# Altium PCB Nyiri_Levente.PcbDoc
Units mm, origin at the board's own origin, x right, y up, seen from the top; angles counter-clockwise.
Board outline 90.17 x 68.76 mm, 2 copper layers (Top Layer, Bottom Layer); 40 components, 73 nets, 301 pads, 174 vias.
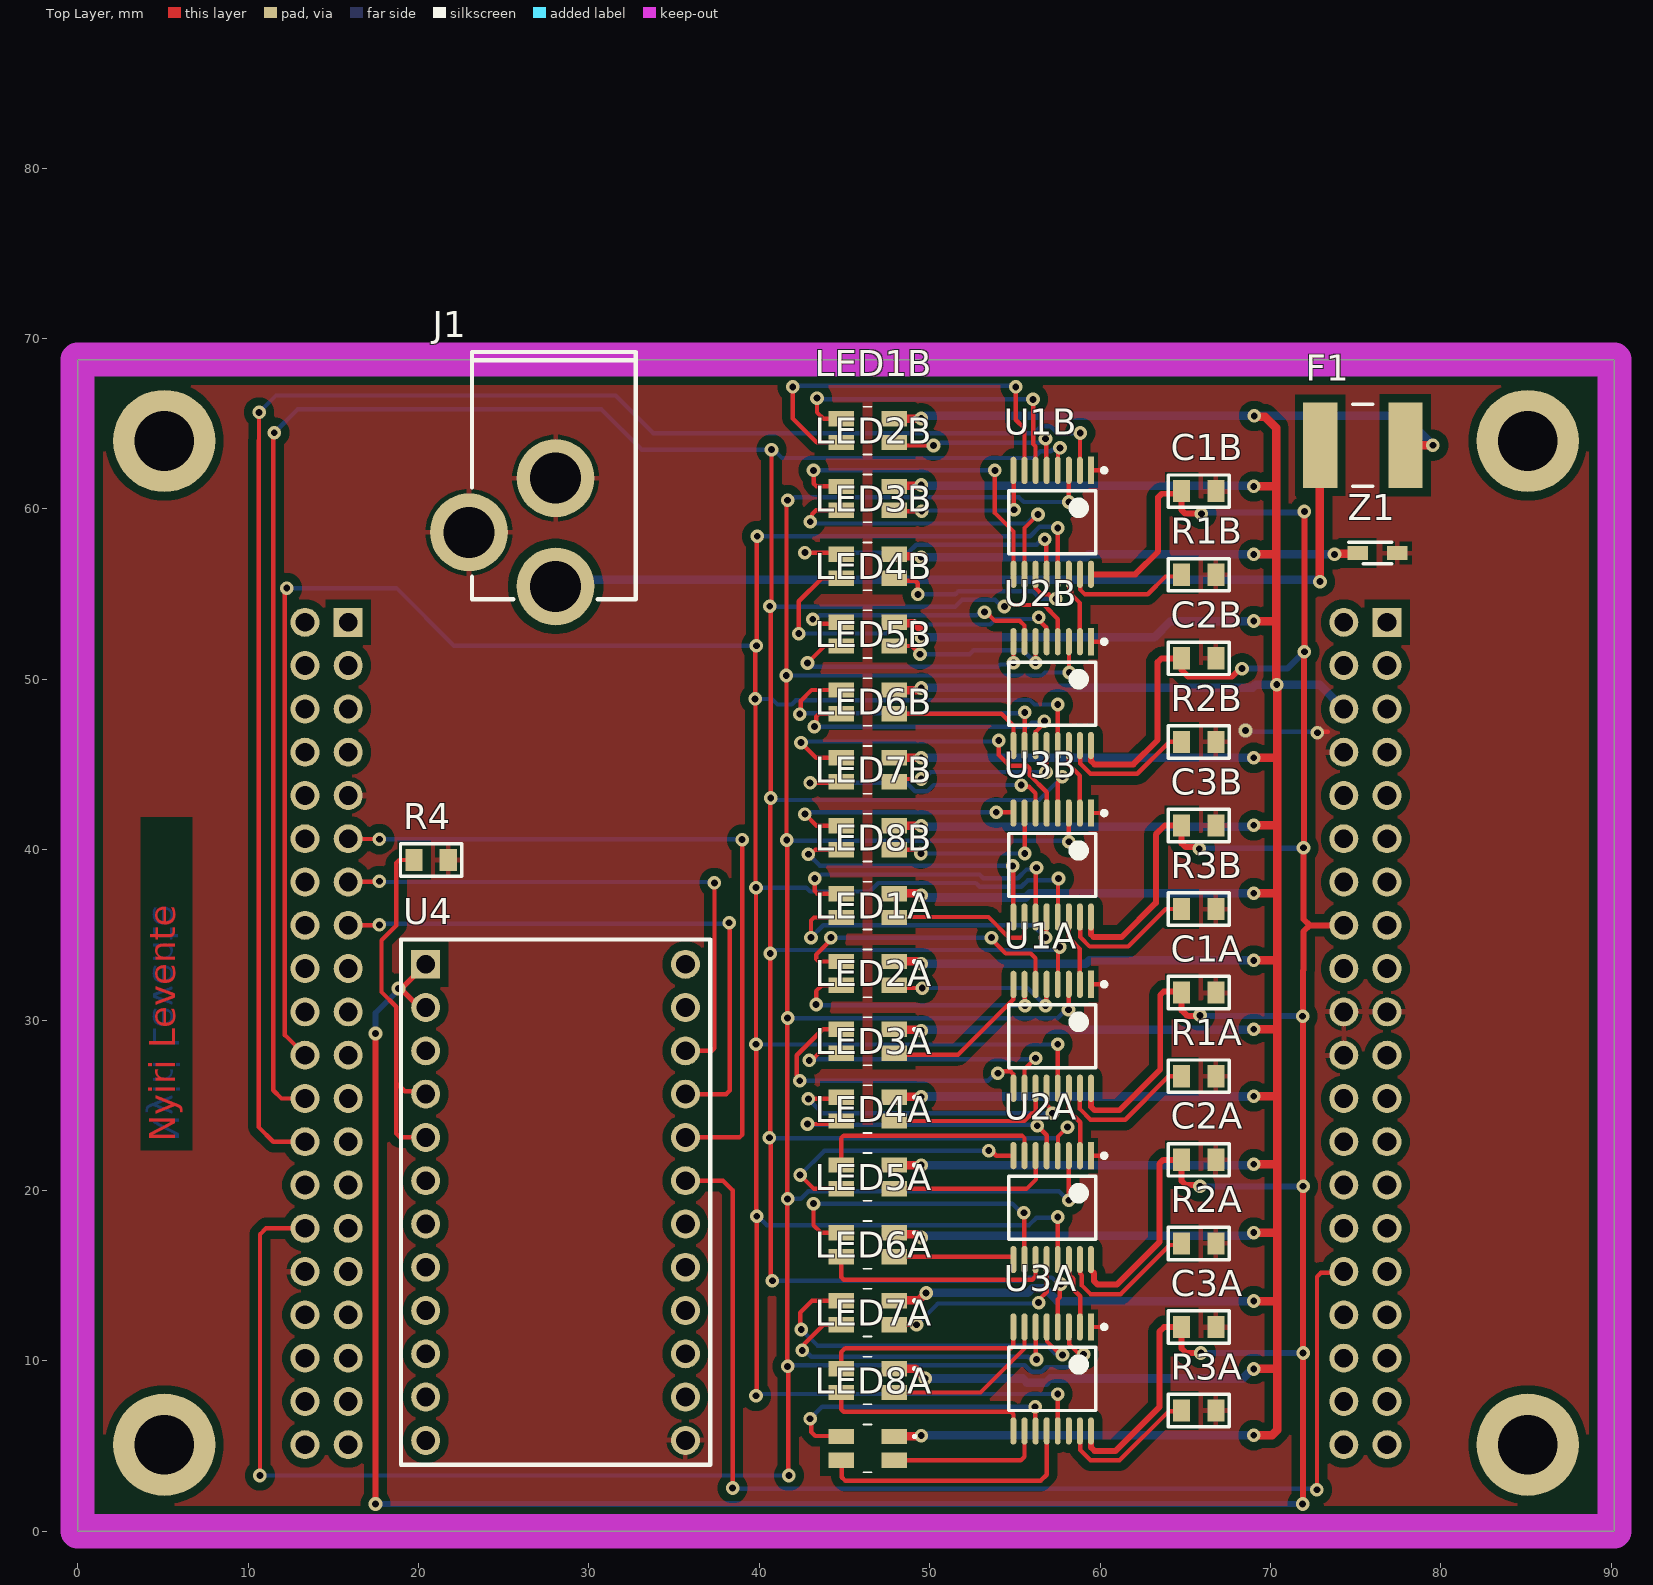
[diagram p0: Top Layer view]
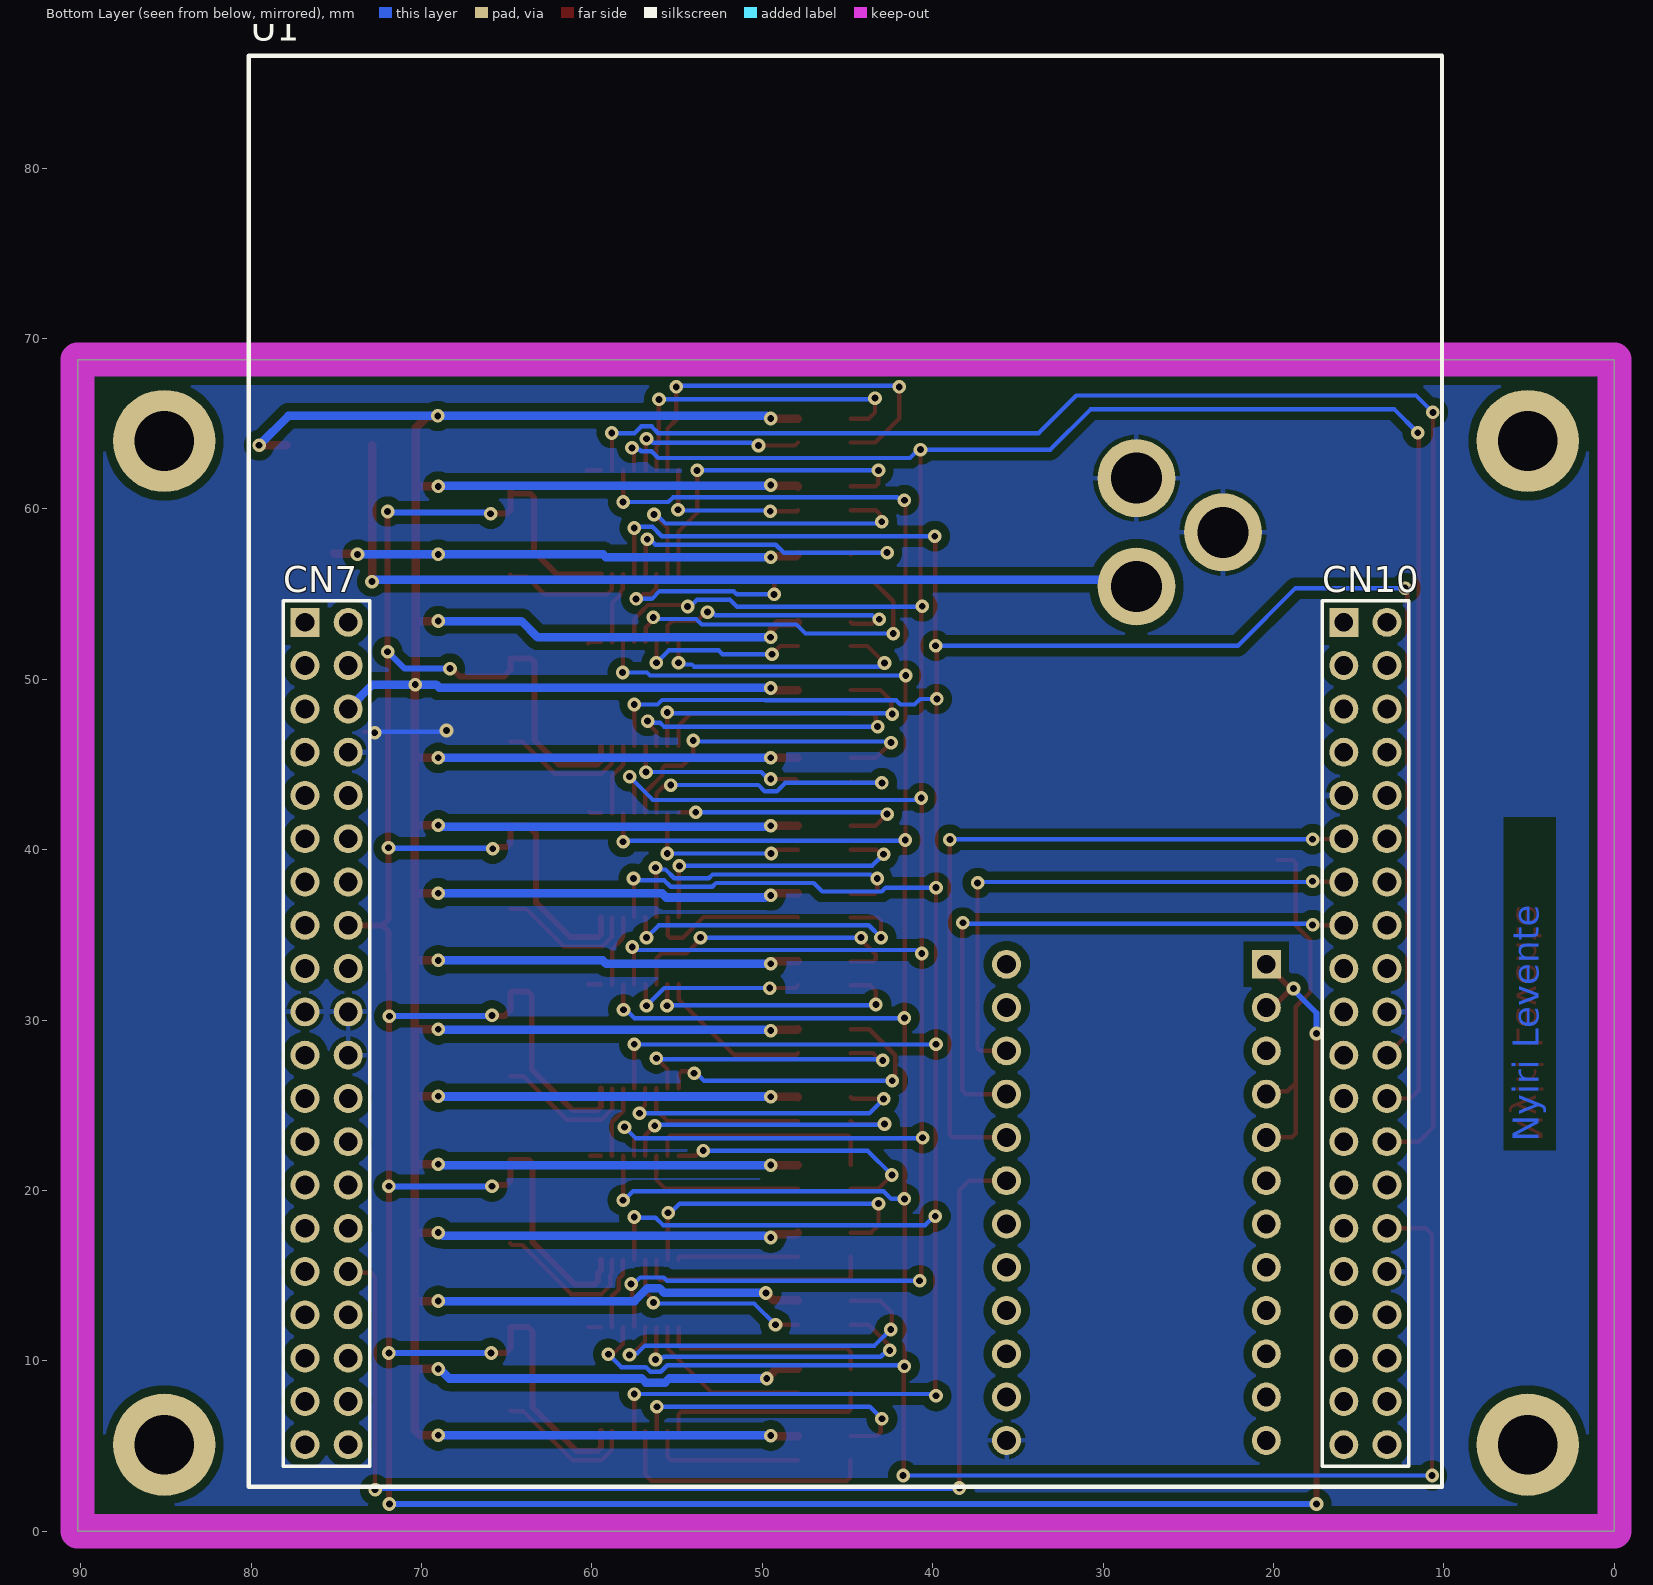
[diagram p1: Bottom Layer view, seen from below]
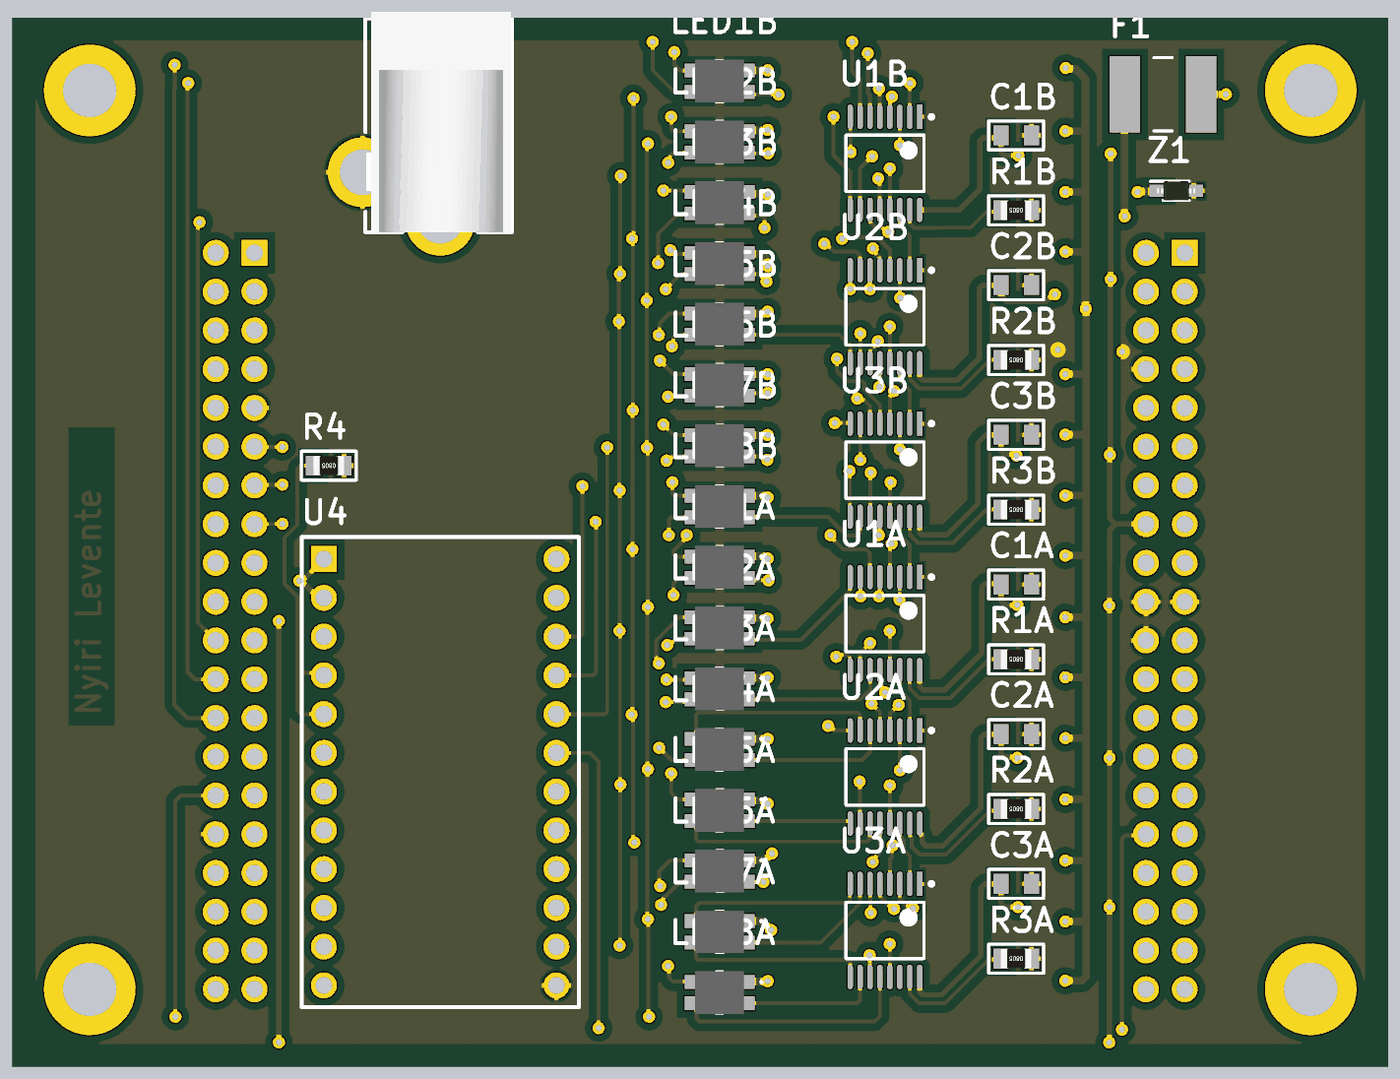
[diagram p2: 3D render of the assembled board from above, using the file's embedded part models]

## Layer stack, top to bottom
Top Solder: solder mask 0.0102, Solder Resist, Dk 3.5
Top Layer: signal copper 0.0356
Dielectric 1: dielectric 0.32, FR-4, Dk 4.8
Bottom Layer: signal copper 0.0356
Bottom Solder: solder mask 0.0102, Solder Resist, Dk 3.5

## Board outline
0,0 0,68.758 90.17,68.758 90.17,0

## Design rules (kind name [scope] priority, off if disabled: settings)
BoardOutlineClearance [All] p1: gap=0.5 ignorepadtopadclearanceinfootprint=FALSE
Clearance [All] p1: gap=0.25 ignorepadtopadclearanceinfootprint=FALSE except(0: Arc-Hole Track-Hole SMDPad-Hole THPad-Hole Via-Hole Fill-Hole Poly-Hole Region-Hole Text-Hole; 0.2: Track-THPad Track-Via THPad-THPad THPad-Via Via-Via; 0.5: Arc-Poly Track-Poly SMDPad-Poly THPad-Poly Via-Poly Fill-Poly Poly-Poly)
ComponentClearance [All] p1: gap=0.254 collisioncheckmode=3 verticalgap=0.2 showdistances=FALSE donotcheckwithout3dbody=TRUE
DiffPairsRouting [All] p1: maxlimit=0.25 minlimit=0.25 mostfreqgap=0.25 toplayer_minwidth=0.3 toplayer_maxwidth=0.38 toplayer_prefwidth=0.38 bottomlayer_minwidth=0.3 bottomlayer_maxwidth=0.38 bottomlayer_prefwidth=0.38 maxuncoupledlength=12.7
HoleSize [All] p1: absolutevalues=TRUE maxlimit=5 minlimit=0.4 maxpercent=80.000 minpercent=20.000
HoleToHoleClearance [All] p1: gap=0.25 allowstackedmicrovias=TRUE
MinimumAnnularRing [All] p1: minimumring=0.2
MinimumSolderMaskSliver [All] p1: minsoldermaskwidth=0.05
PlaneClearance [All] p1: clearance=0.5
PlaneConnect [All] p1: pad.planeconnectstyle=Relief pad.reliefexpansion=0.5 pad.reliefentries=4 pad.reliefconductorwidth=0.3 pad.reliefairgap=0.25 via.planeconnectstyle=Direct via.reliefexpansion=0.508 via.reliefentries=4 via.reliefconductorwidth=0.254 via.reliefairgap=0.254
PolygonConnect [All] p1: thpad.connectstyle=Relief thpad.reliefconductorwidth=0.3 thpad.reliefentries=4 thpad.polygonreliefangle="90 Angle" thpad.airgapwidth=0.25 smdpad.connectstyle=Relief smdpad.reliefconductorwidth=0.3 smdpad.reliefentries=4 smdpad.polygonreliefangle="90 Angle" smdpad.airgapwidth=0.25 via.connectstyle=Direct via.reliefconductorwidth=0.254 via.reliefentries=4 via.polygonreliefangle="90 Angle" via.airgapwidth=0.254
RoutingVias [All] p1: holewidth=0.4 width=0.8 viastyle="Through Hole" minholewidth=0.4 minwidth=0.7 maxholewidth=0.7 maxwidth=1.2
SilkToSilkClearance [All] p1: silktosilkclearance=0.1
SilkToSolderMaskClearance [IsPad] p1: minsilkscreentomaskgap=0.1 clearancetoexposedcopper=TRUE
SolderMaskExpansion [All] p1: expansion=0.1 istentingtop=FALSE
Width Width_2 [InNet('NetF1_1')] p1: maxlimit=0.5 minlimit=0.254 preferedwidth=0.45 minimp=50.000000 maximp=50.000000 favimp=50.000000
Width [InNet('5V')] p2: maxlimit=0.5 minlimit=0.25 preferedwidth=0.45 minimp=50.000000 maximp=50.000000 favimp=50.000000
Width Width_1 [InNet('3V3')] p3: maxlimit=0.35 minlimit=0.35 preferedwidth=0.35 minimp=50.000000 maximp=50.000000 favimp=50.000000
Width Width_alap [All] p4: maxlimit=0.254 minlimit=0.254 preferedwidth=0.254
21 further rules are at their usual default settings.

## Classes and differential pairs
channel class LED: U_LED1 U_LED2

## Components (designator, comment, footprint, x,y, rotation, side; value= is the part's Value field where it differs from the comment)
C1A "100nF" FP_0805_CAP_085 65.786,31.609 r180 top (schematic designator C1)
C1B "100nF" FP_0805_CAP_085 65.786,61.036 r180 top (schematic designator C1)
C2A "100nF" FP_0805_CAP_085 65.786,21.8 r180 top (schematic designator C2)
C2B "100nF" FP_0805_CAP_085 65.786,51.227 r180 top (schematic designator C2)
C3A "100nF" FP_0805_CAP_085 65.786,11.991 r180 top (schematic designator C3)
C3B "100nF" FP_0805_CAP_085 65.786,41.418 r180 top (schematic designator C3)
F1 "FUSE" 1812L125/16DR2.0 75.413,63.729 r0 top
J1 "2.xmm" FP_DC_TAP_ANYA 28.042,55.448 r0 top
LED1A "150141M173100" 150141M173100 46.354,32.738 r0 top (schematic designator LED1)
LED1B "150141M173100" 150141M173100 46.354,64.592 r0 top (schematic designator LED1)
LED2A "150141M173100" 150141M173100 46.354,28.756 r0 top (schematic designator LED2)
LED2B "150141M173100" 150141M173100 46.354,60.61 r0 top (schematic designator LED2)
LED3A "150141M173100" 150141M173100 46.354,24.774 r0 top (schematic designator LED3)
LED3B "150141M173100" 150141M173100 46.354,56.629 r0 top (schematic designator LED3)
LED4A "150141M173100" 150141M173100 46.354,20.793 r0 top (schematic designator LED4)
LED4B "150141M173100" 150141M173100 46.354,52.647 r0 top (schematic designator LED4)
LED5A "150141M173100" 150141M173100 46.354,16.811 r0 top (schematic designator LED5)
LED5B "150141M173100" 150141M173100 46.354,48.665 r0 top (schematic designator LED5)
LED6A "150141M173100" 150141M173100 46.354,12.829 r0 top (schematic designator LED6)
LED6B "150141M173100" 150141M173100 46.354,44.683 r0 top (schematic designator LED6)
LED7A "150141M173100" 150141M173100 46.354,8.847 r0 top (schematic designator LED7)
LED7B "150141M173100" 150141M173100 46.354,40.702 r0 top (schematic designator LED7)
LED8A "150141M173100" 150141M173100 46.354,4.866 r0 top (schematic designator LED8)
LED8B "150141M173100" 150141M173100 46.354,36.72 r0 top (schematic designator LED8)
R1A "1K" FP_0805_RES 65.786,26.705 r180 top (schematic designator R1)
R1B "1K" FP_0805_RES 65.786,56.132 r180 top (schematic designator R1)
R2A "1K" FP_0805_RES 65.786,16.896 r180 top (schematic designator R2)
R2B "1K" FP_0805_RES 65.786,46.323 r180 top (schematic designator R2)
R3A "1K" FP_0805_RES 65.786,7.087 r180 top (schematic designator R3)
R3B "1K" FP_0805_RES 65.786,36.514 r180 top (schematic designator R3)
R4 "1K" FP_0805_RES 20.745,39.395 r180 top
U1 "NUCLEO-F446RE" FP_NUCLEO-64_2x20 76.835,53.34 r180 bottom locked
U1A "STP08CP05TTR" TSOP65P640X120-16M 57.185,29.046 r270 top (schematic designator U1)
U1B "STP08CP05TTR" TSOP65P640X120-16M 57.185,59.207 r270 top (schematic designator U1)
U2A "STP08CP05TTR" TSOP65P640X120-16M 57.185,18.993 r270 top (schematic designator U2)
U2B "STP08CP05TTR" TSOP65P640X120-16M 57.185,49.154 r270 top (schematic designator U2)
U3A "STP08CP05TTR" TSOP65P640X120-16M 57.185,8.939 r270 top (schematic designator U3)
U3B "STP08CP05TTR" TSOP65P640X120-16M 57.185,39.1 r270 top (schematic designator U3)
U4 "MKI178V2" FP_DIL24 20.422,33.274 r180 top
Z1 "Zener_6V" SOD2512X115N 76.276,57.404 r0 top

## Footprints (in the part's own frame and the unit in brackets; to place one, negate y for a bottom-side part, rotate by r counter-clockwise, add the part's x,y. Pads: shape width x height; smd on the part's side, far side on the other; paste and mask are expansions set on the pad)
1812L125/16DR2.0 [mm] "Chip Resistor, 2-Leads, Body 4.55x3.24mm, IPC Low Density"
  rect 2x5 smd: 1(-2.5,0) 2(2.5,0)
  silkscreen extent -0.6,-2.4 0.6,2.4, body extent -2.36,-1.71 2.36,1.71, height 1.25
150141M173100 [mm]
  rect 1.5x0.9 smd: 1(1.55,0.7) 2(1.55,-0.7) 3(-1.55,0.7) 4(-1.55,-0.7)
  silkscreen extent -0.25,-1.4 2.8,1.4, body extent -1.6,-1.4 1.6,1.4, height 2.2
FP_0805_CAP_085 [mm] "0805 kapacitás YAGEO 0.85mm magas"
  rect 1x1.3 smd: 1(-1,0) 2(1,0)
  silkscreen extent -1.8,-0.95 1.8,0.95, body extent -1,-0.64 1.03,0.64, height 0.85
FP_0805_RES [mm] "0805 ellenállás"
  rect 1x1.3 smd: 1(-1,0) 2(1,0)
  silkscreen extent -1.8,-0.95 1.8,0.95, body extent -1,-0.62 1,0.63, height 0.62
FP_DC_TAP_ANYA [mil] "DC HEBA25 TÁPFESZÜLTSÉG ALJZAT ZÁRT, NYÁKBA 90°"
  round 180 hole 118: 1(0,0) 2(0,250) 3(-200,125)
  silkscreen extent -193,-30 185,541, body extent -190,-31 183,539, height 440
FP_DIL24 [mm] "DIL24"
  rect 1.7x1.7 hole 1.1: 1(0,0)
  round 1.7 hole 1.1: 2(0,2.54) 3(0,5.08) 4(0,7.62) 5(0,10.16) 6(0,12.7) 7(0,15.24) 8(0,17.78) 9(0,20.32) 10(0,22.86) 11(0,25.4) 12(0,27.94) 13(-15.24,27.94) 14(-15.24,25.4) 15(-15.24,22.86) 16(-15.24,20.32) 17(-15.24,17.78) 18(-15.24,15.24) 19(-15.24,12.7) 20(-15.24,10.16) 21(-15.24,7.62) 22(-15.24,5.08) 23(-15.24,2.54) 24(-15.24,0)
  silkscreen extent -16.7,-1.45 1.45,29.37, body extent -16.52,-1.28 1.28,29.21, height 4.86
FP_NUCLEO-64_2x20 [mm]
  round 1.7 hole 1.1: 0(0,-48.26) 0(2.54,-48.26) 0(60.96,-48.26) 0(63.5,-48.26) 2(2.54,0) 3(0,-2.54) 4(2.54,-2.54) 5(0,-5.08) 6(2.54,-5.08) 7(0,-7.62) 8(2.54,-7.62) 9(0,-10.16) 10(2.54,-10.16) 11(0,-12.7) 12(2.54,-12.7) 13(0,-15.24) 14(2.54,-15.24) 15(0,-17.78) 16(2.54,-17.78) 17(0,-20.32) 18(2.54,-20.32) 19(0,-22.86) 20(2.54,-22.86) 21(0,-25.4) 22(2.54,-25.4) 23(0,-27.94) 24(2.54,-27.94) 25(0,-30.48) 26(2.54,-30.48) 27(0,-33.02) 28(2.54,-33.02) 29(0,-35.56) 30(2.54,-35.56) 31(0,-38.1) 32(2.54,-38.1) 33(0,-40.64) 34(2.54,-40.64) 35(0,-43.18) 36(2.54,-43.18) 37(0,-45.72) 38(2.54,-45.72) 40(63.5,0) 41(60.96,-2.54) 42(63.5,-2.54) 43(60.96,-5.08) 44(63.5,-5.08) 45(60.96,-7.62) 46(63.5,-7.62) 47(60.96,-10.16) 48(63.5,-10.16) 49(60.96,-12.7) 50(63.5,-12.7) 51(60.96,-15.24) 52(63.5,-15.24) 53(60.96,-17.78) 54(63.5,-17.78) 55(60.96,-20.32) 56(63.5,-20.32) 57(60.96,-22.86) 58(63.5,-22.86) 59(60.96,-25.4) 60(63.5,-25.4) 61(60.96,-27.94) 62(63.5,-27.94) 63(60.96,-30.48) 64(63.5,-30.48) 65(60.96,-33.02) 66(63.5,-33.02) 67(60.96,-35.56) 68(63.5,-35.56) 69(60.96,-38.1) 70(63.5,-38.1) 71(60.96,-40.64) 72(63.5,-40.64) 73(60.96,-43.18) 74(63.5,-43.18) 75(60.96,-45.72) 76(63.5,-45.72)
  rect 1.7x1.7 hole 1.1: 1(0,0) 39(60.96,0)
  silkscreen extent -3.3,-50.73 66.72,33.25, body extent -3.3,-50.72 66.72,33.25, height 11
SOD2512X115N [mm]
  rect 1.2x0.8 smd: 1(-1.15,0) 2(1.15,0)
  silkscreen extent -1.7,-0.62 0.85,0.63, body extent -1.25,-0.63 1.25,0.63, height 1.04
TSOP65P640X120-16M [mm] "TSOP, 16-Leads, Body 5,00x4,40mm, Pitch 0,65mm, IPC Low Density"
  rect 1.6x0.35 smd: 1(-3.05,2.275)
  oval 1.6x0.35 smd: 2(-3.05,1.625) 3(-3.05,0.975) 4(-3.05,0.325) 5(-3.05,-0.325) 6(-3.05,-0.975) 7(-3.05,-1.625) 8(-3.05,-2.275) 9(3.05,-2.275) 10(3.05,-1.625) 11(3.05,-0.975) 12(3.05,-0.325) 13(3.05,0.325) 14(3.05,0.975) 15(3.05,1.625) 16(3.05,2.275)
  silkscreen extent -3.17,-2.55 1.85,3.17, body extent -2.25,-2.55 2.25,2.55, height 1.2

## Part data
C1A C1B C2A C2B C3A C3B: library part CAP, "Capacitor", Name=0805B104K500NT, Reference=82-13-46, Supplier=Lomex
F1: library part 1812L125/16DR, "PTC Resettable Fuse, 16V, Surface Mount", ComponentLink1Description=https://datasheet.ciiva.com:443/pdfs/VipMasterIC/IC/LFSI/LFSI-S-A0007892087/LFSI-S-A0007892087-1.pdf?src-supplier=IHS+Markit, ComponentLink1URL=https://datasheet.ciiva.com:443/pdfs/VipMasterIC/IC/LFSI/LFSI-S-A0007892087/LFSI-S-A0007892087-1.pdf?src-supplier=IHS+Markit, ComponentLink2Description=https://datasheet.ciiva.com/12541/littelfuse-ptc-1812l-12541791.pdf?src-supplier=Mouser, ComponentLink2URL=https://datasheet.ciiva.com/12541/littelfuse-ptc-1812l-12541791.pdf?src-supplier=Mouser, ComponentLink3Description=https://datasheet.ciiva.com/1273/48544-1273746.pdf?src-supplier=Element14, ComponentLink3URL=https://datasheet.ciiva.com/1273/48544-1273746.pdf?src-supplier=Element14, ComponentLink4Description=https://datasheet.ciiva.com/326/littelfuse-ptc-1812l-326975.pdf?src-supplier=Digikey, ComponentLink4URL=https://datasheet.ciiva.com/326/littelfuse-ptc-1812l-326975.pdf?src-supplier=Digikey, ComponentLink5Description=https://datasheet.ciiva.com/326/littelfuse-ptc-1812l-326976.pdf?src-supplier=Digikey, ComponentLink5URL=https://datasheet.ciiva.com/326/littelfuse-ptc-1812l-326976.pdf?src-supplier=Digikey, ComponentLink6Description=https://datasheet.ciiva.com/326/littelfuse-ptc-1812l-326977.pdf?src-supplier=Digikey, ComponentLink6URL=https://datasheet.ciiva.com/326/littelfuse-ptc-1812l-326977.pdf?src-supplier=Digikey, Name=1812L125/16DR, Reference=44-04-71, Supplier=Lomex
J1: library part DC_TAP_ANYA, "2.xmm DC HEBA25 TÁPFESZÜLTSÉG ALJZAT ZÁRT, NYÁKBA 90°", Name="TÁP DC ANYA 5.5/2.1/9.5mm DCS-5521-5", Reference=43-07-67, Supplier=Lomex
LED1A LED1B LED2A LED2B LED3A LED3B LED4A LED4B LED5A LED5B LED6A LED6B LED7A LED7B LED8A LED8B: "LED", Name=FYLS-3528RGBC-CA, Reference=95-03-52, Supplier=Lomex
R1A R1B R2A R2B R3A R3B R4: library part RES, "Resistor", Name=CR-05JL7, Reference=81-10-87, Supplier=Lomex
U1A U1B U2A U2B U3A U3B: "Low voltage, low current power 8-bit shift register", Name=STP08CP05TTR, Reference=Tanszék, Supplier=ST
U4: library part MKI160V1, "LSM6DS3 inertial module adapter", Name=MKI178V2, Reference=Tanszék, Supplier=ST
Z1: library part BZT52C6V2S, "Zener Diode", Name=BZT52C6V2S, Reference=85-02-89, Supplier=Lomex
U1: Name="Nucleo F446RE", Reference=NUCLEO, Supplier=Tanszék

## Free pads (board coordinates)
  round 6 hole 3.5: ""(5.08,5.08) ""(5.08,63.983) ""(85.09,5.08) ""(85.09,63.983)

## Via types
v1: diameter 0.8, hole 0.4, Top Layer to Bottom Layer, 174 vias

## Nets (pads, with @x,y where several pads share a name; then routed paths per layer and width w, separated by ;. In a path a pad name is that pad's centre, name@x,y a point inside that pad or via, vN(x,y) a via of type N, cw(c..) or ccw(c..) an arc to the next point about the centre after c; other vN are vias at no path point)
3V3: C1A.2 C1B.2 C2A.2 C2B.2 C3A.2 C3B.2 U1.16 U1A.16 U1B.16 U2A.16 U2B.16 U3A.16 U3B.16 U4.1 U4.2 | length 269
  Top Layer w0.35: v1(17.475,1.6) v1(17.475,29.21) ; v1(18.821,31.852) 18.908,31.938 19.085,31.938 U4.1 ; v1@18.943,31.852 20.061,30.734 U4.2 ; U3A.16 59.46,4.923 59.665,4.718 60.909,4.718 63.475,7.283 63.475,11.709 63.756,11.991 C3A.2 64.786,10.728 65.049,10.465 v1(65.913,10.465) ; U2A.16@59.46,15.932 59.46,15.318 59.646,15.131 59.646,14.676 59.851,14.471 60.979,14.471 63.475,16.967 63.475,21.565 63.71,21.8 C2A.2 64.786,20.558 65.024,20.32 65.786,20.32 v1(65.862,20.244) ; U1A.16@59.46,25.976 59.46,24.912 59.665,24.707 61.131,24.707 63.525,27.102 63.525,31.469 63.73,31.674 C1A.2@64.721,31.674 ; U3B.16@59.46,36.02 59.46,35.019 59.609,34.87 61.261,34.87 63.271,36.881 63.271,40.894 63.796,41.418 C3B.2 64.786,40.37 65.014,40.142 65.725,40.142 v1(65.811,40.056) ; U2B.16@59.46,46.063 59.46,45.207 59.665,45.002 61.944,45.002 63.373,46.431 63.373,51.003 63.597,51.227 C2B.2 64.77,51.211 64.77,50.548 65.166,50.152 67.734,50.152 68.204,50.622 v1(68.326,50.622) ; U1B.16 62.063,56.157 63.398,57.493 63.398,60.679 63.603,60.884 64.634,60.884 C1B.2 64.786,59.92 64.991,59.715 v1(65.938,59.715) ; C1A.2 64.786,30.566 65.1,30.251 65.839,30.251 v1(65.862,30.275) ; v1(71.882,1.6) 71.895,1.613 71.895,10.452 v1(71.907,10.465) v1(71.907,20.244) 71.907,32.918 71.933,32.944 71.933,35.204 72.288,35.56 ; v1(71.984,59.842) v1(71.984,51.613) 71.958,51.587 71.958,40.132 v1(71.933,40.107) 71.933,35.916 72.288,35.56 ; U1.16 72.288,35.56
  Bottom Layer w0.35: v1(17.475,1.6) v1(71.882,1.6) ; v1(17.475,29.21) 17.475,30.415 18.821,31.761 v1(18.821,31.852) ; v1(65.811,40.056) 65.837,40.081 71.907,40.081 v1(71.933,40.107) ; v1(65.862,20.244) v1(71.907,20.244) ; v1(65.862,30.275) 65.887,30.251 71.857,30.251 v1(71.882,30.226) ; v1(65.913,10.465) v1(71.907,10.465) ; v1(65.938,59.715) 66.002,59.779 71.92,59.779 v1(71.984,59.842) ; v1(68.326,50.622) 68.339,50.635 71.006,50.635 v1(71.984,51.613)
5V: F1.2 LED1A.1 LED1B.1 LED2A.1 LED2B.1 LED3A.1 LED3B.1 LED4A.1 LED4B.1 LED5A.1 LED5B.1 LED6A.1 LED6B.1 LED7A.1 LED7B.1 LED8A.1 LED8B.1 U1.6 Z1.1 | length 444.2
  Top Layer w0.5: LED8A.1 47.928,5.589 v1@49.354,5.589 ; LED7A.1 47.906,9.549 49.15,9.549 v1(49.733,8.966) ; LED6A.1 47.922,13.546 49.335,13.546 49.768,13.98 v1(49.784,13.98) ; LED5A.1 47.976,17.439 v1@49.224,17.439 ; LED4A.1 47.907,21.491 v1@49.375,21.491 ; LED3A.1 47.918,25.488 v1@49.44,25.488 ; LED2A.1 47.942,29.419 49.467,29.419 v1(49.505,29.382) ; LED1A.1 47.924,33.458 49.275,33.458 49.423,33.309 v1(49.505,33.309) ; LED8B.1 47.914,37.43 49.308,37.43 49.423,37.314 v1(49.505,37.314) ; LED7B.1 v1@49.403,41.402 ; LED6B.1 47.908,45.387 v1@49.324,45.387 ; LED5B.1 47.911,49.359 49.293,49.359 49.423,49.489 v1(49.505,49.489) ; LED4B.1 47.966,53.285 49.103,53.285 49.449,52.94 ; LED3B.1 48.012,57.221 49.447,57.221 v1(49.505,57.164) ; LED2B.1 47.949,61.355 49.46,61.355 v1(49.505,61.399) ; LED1B.1 47.91,65.298 49.499,65.298 v1(49.505,65.303) ; v1(69.012,5.639) 70.091,5.639 70.383,5.932 70.383,9.525 ; v1(69.012,9.525) 70.383,9.525 ; v1(69.012,13.513) 70.383,13.513 ; v1(69.012,17.526) 70.383,17.526 ; v1(69.012,21.539) 70.383,21.539 ; v1(69.012,25.527) 70.383,25.527 ; v1(69.012,29.464) 70.383,29.464 ; v1(69.012,33.503) 70.383,33.503 ; v1(69.012,37.44) 70.383,37.44 ; v1(69.012,41.427) 70.383,41.427 ; v1(69.012,45.39) 70.383,45.39 ; v1(69.012,53.416) 70.32,53.416 ; v1(69.012,57.328) 70.32,57.328 ; v1(69.012,61.316) 70.32,61.316 ; v1(69.037,65.456) 69.095,65.398 69.681,65.398 70.32,64.759 70.32,61.316 ; v1(73.748,57.328) 73.786,57.366 75.088,57.366 Z1.1 ; U1.6 U1.6@74.295,48.273 ; F1.2 v1(79.527,63.729) ; 70.32,53.416 70.32,49.72 70.383,49.657 70.383,45.39 ; 70.32,53.416 70.32,57.328 ; 70.32,57.328 70.32,61.316 ; 70.383,9.525 70.383,13.513 ; 70.383,13.513 70.383,17.526 ; 70.383,17.526 70.383,21.539 ; 70.383,21.539 70.383,25.527 ; 70.383,25.527 70.383,29.464 ; 70.383,29.464 70.383,33.503 ; 70.383,33.503 70.383,37.44 ; 70.383,37.44 70.383,41.427 ; 70.383,41.427 70.383,45.39
  Bottom Layer w0.5: v1@49.39,5.626 v1@69.126,5.626 ; v1@49.466,25.514 v1@69.05,25.514 ; v1(49.505,17.24) 49.562,17.298 49.774,17.298 49.817,17.34 v1@68.745,17.34 ; v1(49.505,21.488) 68.961,21.488 v1(69.012,21.539) ; v1(49.505,29.382) 49.548,29.425 68.973,29.425 v1(69.012,29.464) ; v1(49.505,33.309) 59.161,33.309 59.355,33.503 v1@69.088,33.503 ; v1(49.505,37.314) 49.562,37.257 49.774,37.257 49.84,37.191 55.634,37.191 55.882,37.44 v1(69.012,37.44) ; v1(49.505,41.402) 49.562,41.345 49.774,41.345 49.779,41.339 68.712,41.339 68.742,41.37 68.954,41.37 v1(69.012,41.427) ; v1(49.505,45.39) 56.456,45.39 56.468,45.402 57.172,45.402 57.184,45.39 v1(69.012,45.39) ; v1(49.505,49.489) 49.527,49.511 68.958,49.511 69.13,49.682 72.873,49.682 U1.6 ; v1(49.505,57.164) 59.176,57.164 59.34,57.328 v1(73.748,57.328) ; v1(49.505,61.399) 49.546,61.357 68.97,61.357 v1(69.012,61.316) ; v1(49.505,65.303) 49.586,65.303 49.746,65.464 69.029,65.464 v1(69.037,65.456) 77.8,65.456 v1(79.527,63.729) ; v1(49.506,52.466) 63.184,52.466 64.135,53.416 v1(69.012,53.416) ; v1(49.733,8.966) 55.464,8.966 55.7,8.73 56.822,8.73 57.058,8.966 68.372,8.966 v1@68.943,9.538 ; v1(49.784,13.98) 49.8,13.995 55.76,13.995 56.035,14.27 56.739,14.27 57.496,13.513 v1@69.063,13.513
  other v1: 49.505,5.613 49.505,25.502 70.358,49.682
D6_2A: LED6A.2 U2A.12 | length 11.7
  Top Layer w0.254: LED6A.2 47.918,12.116 v1(49.225,12.116) ; v1(56.387,13.42) 56.387,13.567 56.86,14.041 U2A.12
  Bottom Layer w0.254: v1(49.225,12.116) 50.478,13.368 56.335,13.368 v1(56.387,13.42)
D6_2B: LED6B.2 U2B.12 | length 10.7
  Top Layer w0.254: LED6B.2 48.069,44.147 v1(49.505,44.147) ; v1(56.82,44.552) 56.842,44.574 56.842,46.085 U2B.12
  Bottom Layer w0.254: v1(49.505,44.147) 49.652,44.147 50.057,44.552 v1(56.82,44.552)
GND: C1A.1 C1B.1 C2A.1 C2B.1 C3A.1 C3B.1 J1.2 J1.3 R1A.1 R1B.1 R2A.1 R2B.1 R3A.1 R3B.1 R4.1 U1.8 U1.19 U1.20 U1.22 U1.47 U1.58 U1.70 U1A.1 U1B.1 U2A.1 U2B.1 U3A.1 U3B.1 U4.13 Z1.2 | length 9.4
  Top Layer w0.254: U3A.1 60.223,11.989 ; U2A.1 60.092,22.043 60.096,22.047 ; U1A.1 59.47,32.106 60.223,32.106 ; U3B.1 60.082,42.15 60.147,42.215 ; U2B.1 60.141,52.204 60.223,52.121 ; U1B.1 60.272,62.257 60.3,62.23 ; v1(72.746,46.863) 72.796,46.914 73.355,46.914
  Bottom Layer w0.254: v1(68.529,46.99) 68.593,46.926 72.682,46.926 v1(72.746,46.863)
LED_CLKA: U1.68 U1A.3 U1B.3 U2A.3 U2B.3 U3A.3 U3B.3 | length 218.5
  Top Layer w0.254: v1(10.693,3.277) 10.693,17.424 11.049,17.78 U1.68 ; v1(41.656,60.503) 41.589,60.436 41.589,50.225 v1(41.58,50.216) 41.593,50.203 41.593,40.564 41.646,40.51 41.646,30.134 v1(41.656,30.124) 41.631,30.099 41.631,19.507 41.631,9.703 41.694,9.639 41.694,3.315 v1(41.732,3.277) ; v1(58.141,30.607) 58.15,30.617 58.15,32.086 U1A.3 ; U3A.3 58.179,11.97 58.179,10.986 58.671,10.493 58.925,10.493 v1(59.03,10.389) ; U2A.3 58.163,22.04 58.163,19.434 v1(58.166,19.431) ; U3B.3 58.163,42.147 58.163,40.465 v1(58.166,40.462) ; U2B.3 58.176,52.188 58.176,50.409 v1(58.191,50.394) ; U1B.3 58.163,62.254 58.163,60.404 v1(58.166,60.401)
  Bottom Layer w0.254: v1(10.693,3.277) v1(41.732,3.277) ; v1(41.58,50.216) 56.589,50.216 56.767,50.394 v1(58.191,50.394) ; v1(41.605,40.564) 41.656,40.513 58.115,40.513 v1(58.166,40.462) ; v1(41.656,9.677) 41.716,9.738 55.579,9.738 55.96,9.357 56.562,9.357 56.829,9.623 58.264,9.623 v1(59.03,10.389) ; v1(41.656,19.507) 41.662,19.513 42.437,19.513 42.879,19.955 57.585,19.955 58.109,19.431 v1(58.166,19.431) ; v1(41.656,30.124) 41.672,30.109 57.494,30.109 57.993,30.607 v1(58.141,30.607) ; v1(41.656,60.503) 41.76,60.607 42.013,60.607 42.078,60.672 55.241,60.672 55.512,60.401 v1(58.166,60.401)
LED_LEA: U1.62 U1A.4 U1B.4 U2A.4 U2B.4 U3A.4 U3B.4 | length 236.9
  Top Layer w0.254: v1(11.532,64.465) 11.481,64.414 11.481,25.883 11.963,25.4 U1.62 ; v1(40.716,63.475) 40.716,54.381 v1(40.615,54.28) 40.665,54.229 v1(40.665,43.028) 40.64,43.002 v1(40.64,33.909) 40.64,23.139 v1(40.589,23.089) 40.678,23 40.678,14.795 v1(40.767,14.707) ; v1(54.381,54.266) 54.474,54.359 56.701,54.359 57.127,53.933 57.127,53.912 57.51,53.529 57.51,52.24 57.492,52.222 U2B.4 ; U3A.4 57.51,13.606 57.637,13.733 57.637,14.454 v1(57.697,14.514) ; U2A.4 57.529,22.061 57.529,23.162 v1(58.084,23.718) ; U1A.4 57.529,32.115 57.529,34.191 v1(57.626,34.289) ; U3B.4 57.508,42.152 57.508,43.924 57.783,44.199 v1(57.783,44.284) ; U1B.4 57.529,62.276 57.529,63.317 57.641,63.429 v1(57.641,63.577)
  Bottom Layer w0.254: v1(11.532,64.465) 12.903,65.837 30.734,65.837 33.096,63.475 40.843,63.475 41.332,62.986 56.096,62.986 56.493,63.383 57.096,63.383 57.185,63.472 57.536,63.472 v1(57.641,63.577) ; v1(40.589,23.089) 40.605,23.073 57.439,23.073 v1(58.084,23.718) ; v1(40.615,54.28) 40.64,54.254 51.477,54.254 51.89,54.667 53.833,54.667 54.234,54.266 v1(54.381,54.266) ; v1(40.64,33.909) 40.788,33.909 40.991,34.112 57.302,34.112 57.478,34.289 v1(57.626,34.289) ; v1(40.665,43.028) 40.77,42.923 41.08,42.923 41.087,42.916 56.416,42.916 v1(57.783,44.284) ; v1(40.767,14.707) 55.585,14.707 55.775,14.897 57.166,14.897 57.549,14.514 v1(57.697,14.514)
LED_OEA: U1.60 U1A.13 U1B.13 U2A.13 U2B.13 U3A.13 U3B.13 | length 230
  Top Layer w0.254: v1(12.268,55.347) 12.268,55.199 12.158,55.089 12.158,29.117 U1.60 ; v1(39.802,7.95) 39.853,8.001 v1(39.853,18.491) 39.827,18.517 39.827,28.55 v1(39.802,28.575) 39.802,37.918 39.776,37.943 39.776,48.819 v1(39.751,48.844) 39.751,51.892 39.853,51.994 39.853,58.369 v1(39.878,58.395) ; U1B.13@57.495,56.142 U1B.13 57.508,56.16 57.508,58.875 v1(57.506,58.877) ; v1(57.506,8.052) 57.508,8.049 57.508,5.891 U3A.13 ; v1(57.506,18.44) 57.508,18.438 57.508,15.945 U2A.13 ; v1(57.506,28.575) 57.508,28.573 57.508,25.999 U1A.13 ; v1(57.506,48.514) 57.508,48.512 57.508,46.106 U2B.13 U2B.13@57.529,46.122 ; U3B.13 57.529,36.068 57.529,38.275 v1(57.556,38.303)
  Bottom Layer w0.254: v1(12.268,55.347) 18.705,55.347 22.083,51.968 v1(39.827,51.968) ; v1(39.751,48.844) 40.733,48.844 41.063,48.514 41.898,48.514 42.146,48.762 49.806,48.762 49.828,48.784 55.876,48.784 56.146,48.514 v1(57.506,48.514) ; v1(39.802,7.95) 39.903,8.052 v1(57.506,8.052) ; v1(39.802,28.575) 39.814,28.562 57.493,28.562 v1(57.506,28.575) ; v1(39.802,37.77) 42.761,37.77 42.99,37.541 46.475,37.541 46.976,38.041 52.708,38.041 52.931,37.818 55.374,37.818 55.757,38.202 57.455,38.202 v1(57.556,38.303) ; v1(39.853,18.491) 39.909,18.491 40.433,17.967 55.826,17.967 56.248,18.39 57.455,18.39 v1(57.506,18.44) ; v1(39.878,58.395) 55.893,58.395 56.442,58.944 57.439,58.944 v1(57.506,58.877)
LED_SDIA: U1A.2 U3B.14 | length 4.2
  Top Layer w0.254: U3B.14@58.16,36.02 58.16,34.892 58.24,34.812 58.24,34.742 58.81,34.172 U1A.2@58.81,32.076
LED_SDIB: U1.64 U1B.2 | length 97
  Top Layer w0.254: v1(10.643,65.659) 10.64,65.656 10.64,64.041 10.617,64.018 10.617,23.724 11.481,22.86 U1.64 ; U1B.2 58.818,62.265 58.818,64.445 v1(58.826,64.453)
  Bottom Layer w0.254: v1(10.643,65.659) 11.633,66.65 31.572,66.65 33.782,64.44 56.096,64.44 56.493,64.837 57.096,64.837 57.492,64.44 v1@58.813,64.44
NetF1_1: F1.1 J1.1 | length 53.1
  Top Layer w0.5: v1(72.898,55.728) 72.898,63.714 F1.1
  Bottom Layer w0.5: J1.1 28.425,55.831 72.713,55.831 72.817,55.728 v1(72.898,55.728)
NetLED1A_2: LED1A.2 U1A.5 | length 10.7
  Top Layer w0.254: LED1A.2 48.065,31.877 v1(49.555,31.877) ; v1(56.794,30.836) 56.842,30.883 56.842,32.078 U1A.5
  Bottom Layer w0.254: v1(49.555,31.877) 55.753,31.877 v1(56.794,30.836)
NetLED1A_3: LED1A.3 U1A.6 | length 17.2
  Top Layer w0.254: v1(44.196,34.839) 44.196,34.696 43.332,33.833 43.332,33.587 43.481,33.438 LED1A.3 ; v1(53.619,34.839) 53.619,34.747 54.458,33.909 55.931,33.909 56.21,33.63 U1A.6
  Bottom Layer w0.254: v1(44.196,34.839) v1(53.619,34.839)
NetLED1A_4: LED1A.4 U1A.7 | length 16
  Top Layer w0.254: v1(43.332,30.912) 43.332,31.699 43.671,32.038 LED1A.4 ; U1A.7 55.573,32.084 55.573,30.848 v1(55.586,30.836)
  Bottom Layer w0.254: v1(43.332,30.912) 43.37,30.874 55.548,30.874 v1(55.586,30.836)
NetLED1B_2: LED1B.2 U1B.5 | length 11
  Top Layer w0.254: LED1B.2 48.084,63.713 v1(50.216,63.713) ; v1(56.794,64.11) 56.842,64.062 56.842,62.276 U1B.5
  Bottom Layer w0.254: v1(50.216,63.713) 50.32,63.817 50.568,63.817 50.638,63.887 56.424,63.887 56.647,64.11 v1(56.794,64.11)
NetLED1B_3: LED1B.3 U1B.6 | length 19.3
  Top Layer w0.254: v1(43.383,66.497) 43.383,65.659 43.75,65.292 LED1B.3 ; v1(56.058,66.421) 56.058,66.37 56.067,66.361 56.067,63.808 56.21,63.666 U1B.6
  Bottom Layer w0.254: v1(43.383,66.497) 43.459,66.421 v1(56.058,66.421)
NetLED1B_4: LED1B.4 U1B.7 | length 23.5
  Top Layer w0.254: v1(41.961,67.158) 41.961,65.303 43.372,63.892 LED1B.4 ; v1(55.042,67.158) 55.042,65.228 55.56,64.709 U1B.7
  Bottom Layer w0.254: v1(41.961,67.158) 42.027,67.224 54.975,67.224 v1(55.042,67.158)
NetLED2A_2: LED2A.2 U1A.8 | length 9.3
  Top Layer w0.254: LED2A.2 47.995,27.965 51.654,27.965 54.896,31.207 54.896,32.082 U1A.8
NetLED2A_3: LED2A.3 U1A.9 | length 18.5
  Top Layer w0.254: v1(42.367,26.441) 42.367,26.589 42.199,26.757 42.199,27.936 43.719,29.456 LED2A.3 ; v1(54,26.873) 54.148,26.873 54.28,27.005 54.718,27.005 54.892,26.831 54.892,26.015 U1A.9
  Bottom Layer w0.254: v1(42.367,26.441) 53.421,26.441 53.853,26.873 v1(54,26.873)
NetLED2A_4: LED2A.4 U1A.10 | length 17.4
  Top Layer w0.254: v1(42.926,27.635) 43.074,27.635 43.506,28.067 44.794,28.067 LED2A.4 ; U1A.10 55.56,27.112 v1(56.21,27.762)
  Bottom Layer w0.254: v1(42.926,27.635) 42.989,27.699 56.147,27.699 v1(56.21,27.762)
NetLED2B_2: LED2B.2 U1B.8 | length 9.4
  Top Layer w0.254: LED2B.2 47.953,59.862 v1(49.53,59.862) ; U1B.8 54.925,62.242 54.925,59.96 v1(54.94,59.945)
  Bottom Layer w0.254: v1(49.53,59.862) 49.569,59.901 54.895,59.901 v1(54.94,59.945)
NetLED2B_3: LED2B.3 U1B.9 | length 19.7
  Top Layer w0.254: v1(43.18,62.255) 43.199,62.236 43.199,61.474 43.358,61.316 44.799,61.316 LED2B.3 ; v1(53.823,62.255) 53.823,59.754 54.91,58.666 U1B.9
  Bottom Layer w0.254: v1(43.18,62.255) v1(53.823,62.255)
NetLED2B_4: LED2B.4 U1B.10 | length 19.7
  Top Layer w0.254: v1(42.985,59.245) 43.09,59.349 43.09,59.676 43.324,59.91 LED2B.4 ; U1B.10 55.56,58.877 v1(56.348,59.665)
  Bottom Layer w0.254: v1(42.985,59.245) 43.09,59.14 43.401,59.14 43.407,59.135 55.67,59.135 56.2,59.665 v1(56.348,59.665)
NetLED3A_2: LED3A.2 U1A.11 | length 9.9
  Top Layer w0.254: LED3A.2 55.558,24.074 56.011,24.527 56.08,24.527 56.229,24.676 56.229,25.978 U1A.11
NetLED3A_3: LED3A.3 U1A.12 | length 18.2
  Top Layer w0.254: v1(42.875,25.375) 44.705,25.375 LED3A.3 ; U1A.12 56.879,25.978 56.879,25.006 57.201,24.684 v1(57.201,24.536)
  Bottom Layer w0.254: v1(42.875,25.375) 43.713,24.536 v1(57.201,24.536)
NetLED3A_4: LED3A.4 U2A.5 | length 17.6
  Top Layer w0.254: v1(42.824,23.901) 44.631,23.901 LED3A.4 ; v1(56.312,23.8) 56.312,23.792 56.86,23.244 U2A.5
  Bottom Layer w0.254: v1(42.824,23.901) 42.875,23.851 56.261,23.851 v1(56.312,23.8)
NetLED3B_2: LED3B.2 U1B.11 | length 12.8
  Top Layer w0.254: LED3B.2 48.055,55.778 49.153,55.778 49.301,55.63 v1(49.301,54.981) ; U1B.11 56.229,56.139 56.229,55.328 56.576,54.98 56.988,54.98 57.254,54.715 v1(57.402,54.715)
  Bottom Layer w0.254: v1(49.301,54.981) 51.491,54.981 51.681,55.171 56.021,55.171 56.477,54.715 v1(57.402,54.715)
NetLED3B_3: LED3B.3 U1B.12 | length 18.7
  Top Layer w0.254: v1(42.672,57.429) 44.704,57.429 LED3B.3 ; v1(56.744,58.217) 56.842,58.119 56.842,56.176 U1B.12
  Bottom Layer w0.254: v1(42.672,57.429) 48.742,57.429 49.203,57.891 56.27,57.891 56.596,58.217 v1(56.744,58.217)
NetLED3B_4: LED3B.4 U2B.5 | length 21
  Top Layer w0.254: v1(42.316,52.68) 42.316,54.572 43.673,55.929 LED3B.4 ; v1(56.4,53.632) 56.4,53.484 56.842,53.042 56.842,52.222 U2B.5
  Bottom Layer w0.254: v1(42.316,52.68) 47.463,52.68 47.997,53.213 53.555,53.213 53.882,53.539 56.308,53.539 v1(56.4,53.632)
NetLED4A_2: LED4A.2 U2A.6 | length 10
  Top Layer w0.254: LED4A.2 55.678,20.093 56.236,20.65 56.236,20.904 56.229,20.911 56.229,22.024 U2A.6
NetLED4A_3: LED4A.3 U2A.7 | length 13.5
  Top Layer w0.254: LED4A.3 44.804,23.071 44.953,23.22 55.411,23.22 55.56,23.071 U2A.7
NetLED4A_4: LED4A.4 U2A.8 | length 16
  Top Layer w0.254: v1(42.393,20.904) 43.204,20.093 LED4A.4 ; v1(53.467,22.338) 53.603,22.338 53.899,22.043 U2A.8
  Bottom Layer w0.254: v1(42.393,20.904) 43.815,22.327 53.455,22.327 v1(53.467,22.338)
NetLED4B_2: LED4B.2 U2B.6 | length 10.1
  Top Layer w0.254: LED4B.2 48.942,51.947 49.42,51.469 v1(49.427,51.469) ; v1(56.21,50.965) U2B.6
  Bottom Layer w0.254: v1(49.427,51.469) 52.334,51.469 52.557,51.692 55.483,51.692 v1(56.21,50.965)
NetLED4B_3: LED4B.3 U2B.7 | length 15.7
  Top Layer w0.254: v1(43.129,53.518) 43.277,53.518 43.531,53.264 44.721,53.264 LED4B.3 ; v1(53.213,53.94) 53.32,53.94 53.834,53.426 55.286,53.426 55.56,53.152 U2B.7
  Bottom Layer w0.254: v1(43.129,53.518) 43.234,53.622 43.423,53.622 43.551,53.75 52.749,53.75 52.834,53.836 53.109,53.836 v1(53.213,53.94)
NetLED4B_4: LED4B.4 U2B.8 | length 15.9
  Top Layer w0.254: v1(42.824,50.952) 43.819,51.947 LED4B.4 ; U2B.8 54.913,52.201 54.913,50.967 v1(54.915,50.965)
  Bottom Layer w0.254: v1(42.824,50.952) 42.972,50.952 43.183,50.742 54.007,50.742 54.13,50.865 54.815,50.865 v1(54.915,50.965)
NetLED5A_2: LED5A.2 U2A.9 | length 7.1
  Top Layer w0.254: LED5A.2 54.866,16.111 54.91,16.067 U2A.9
NetLED5A_3: LED5A.3 U2A.10 | length 18.4
  Top Layer w0.254: v1(43.18,19.228) 43.18,17.958 43.612,17.526 44.789,17.526 LED5A.3 ; v1(55.524,18.694) 55.542,18.676 55.542,15.96 U2A.10
  Bottom Layer w0.254: v1(43.18,19.228) 54.843,19.228 55.377,18.694 v1(55.524,18.694)
NetLED5A_4: LED5A.4 U2A.11 | length 13.7
  Top Layer w0.254: LED5A.4 44.804,14.914 44.953,14.766 56.015,14.766 56.21,14.961 U2A.11
NetLED5B_2: LED5B.2 U2B.9 | length 8.5
  Top Layer w0.254: LED5B.2 47.92,47.981 54.204,47.981 54.91,47.274 U2B.9
NetLED5B_3: LED5B.3 U2B.10 | length 18.6
  Top Layer w0.254: v1(42.367,47.955) 42.437,48.025 42.437,48.736 43.066,49.365 LED5B.3 ; U2B.10 55.568,46.111 55.568,48.049 v1(55.575,48.057)
  Bottom Layer w0.254: v1(42.367,47.955) 42.418,48.006 55.524,48.006 v1(55.575,48.057)
NetLED5B_4: LED5B.4 U2B.11 | length 17.5
  Top Layer w0.254: v1(43.231,47.219) 43.335,47.323 43.335,47.816 43.484,47.965 LED5B.4 ; U2B.11 56.229,46.122 56.229,46.938 56.728,47.438 v1(56.728,47.543)
  Bottom Layer w0.254: v1(43.231,47.219) 55.765,47.219 55.985,47.439 56.624,47.439 v1(56.728,47.543)
NetLED6A_3: LED6A.3 U3A.5 | length 21.7
  Top Layer w0.254: v1(42.463,11.842) 42.393,11.913 42.393,12.827 43.095,13.529 LED6A.3 ; U3A.5 56.879,11.97 56.879,11.143 57.671,10.35 v1(57.786,10.35)
  Bottom Layer w0.254: v1(42.463,11.842) 43.409,10.897 56.875,10.897 57.317,10.455 57.681,10.455 v1(57.786,10.35)
NetLED6A_4: LED6A.4 U3A.6 | length 18.9
  Top Layer w0.254: v1(42.52,10.617) 42.624,10.722 42.624,10.976 43.778,12.129 LED6A.4 ; U3A.6 56.229,11.97 56.229,10.116 v1(56.261,10.084)
  Bottom Layer w0.254: v1(42.52,10.617) 42.667,10.617 43.043,10.242 55.788,10.242 55.841,10.188 56.157,10.188 v1(56.261,10.084)
NetLED6B_3: LED6B.3 U3B.5 | length 20.4
  Top Layer w0.254: v1(42.443,46.279) 43.339,45.383 LED6B.3 ; v1(54.051,46.406) 54.051,45.557 54.682,44.927 55.706,44.927 55.855,44.778 55.855,44.374 56.86,43.368 U3B.5
  Bottom Layer w0.254: v1(42.443,46.279) 42.507,46.342 53.988,46.342 v1(54.051,46.406)
NetLED6B_4: LED6B.4 U3B.6 | length 16.8
  Top Layer w0.254: v1(42.977,43.917) 44.738,43.917 LED6B.4 ; v1(55.372,43.79) 55.476,43.685 55.831,43.685 56.21,43.305 U3B.6
  Bottom Layer w0.254: v1(42.977,43.917) 48.654,43.917 49.15,43.42 49.859,43.42 50.228,43.79 v1(55.372,43.79)
NetLED7A_2: LED7A.2 U3A.7 | length 10
  Top Layer w0.254: LED7A.2 52.978,8.147 55.56,10.729 U3A.7
NetLED7A_3: LED7A.3 U3A.8 | length 12.3
  Top Layer w0.254: LED7A.3 44.804,10.514 45.034,10.744 54.766,10.744 54.892,10.87 54.892,11.97 U3A.8
NetLED7A_4: LED7A.4 U3A.9 | length 12.2
  Top Layer w0.254: LED7A.4 44.804,7.159 44.953,7.01 54.761,7.01 54.91,6.862 U3A.9
NetLED7B_2: LED7B.2 U3B.7 | length 10.1
  Top Layer w0.254: LED7B.2 49.106,40.002 49.331,39.776 v1(49.479,39.776) ; U3B.7 55.568,42.142 55.568,39.784 v1(55.575,39.776)
  Bottom Layer w0.254: v1(49.479,39.776) v1(55.575,39.776)
NetLED7B_3: LED7B.3 U3B.8 | length 14.7
  Top Layer w0.254: v1(42.672,42.088) 43.358,41.402 LED7B.3 ; v1(53.899,42.189) 54.871,42.189 U3B.8
  Bottom Layer w0.254: v1(42.672,42.088) 42.774,42.189 v1(53.899,42.189)
NetLED7B_4: LED7B.4 U3B.9 | length 17.3
  Top Layer w0.254: v1(42.875,39.726) 43.021,39.726 43.297,40.002 LED7B.4 ; v1(54.864,39.049) 54.892,39.022 54.892,36.068 U3B.9
  Bottom Layer w0.254: v1(42.875,39.726) 43.551,39.049 v1(54.864,39.049)
NetLED8A_2: LED8A.2 U3A.10 | length 9.3
  Top Layer w0.254: LED8A.2 55.347,4.166 55.56,4.379 U3A.10
NetLED8A_3: LED8A.3 U3A.11 | length 17.6
  Top Layer w0.254: v1(42.977,6.604) 43.047,6.534 43.047,5.823 43.282,5.588 44.782,5.588 LED8A.3 ; v1(56.185,7.312) 56.197,7.299 56.197,5.902 U3A.11
  Bottom Layer w0.254: v1(42.977,6.604) 43.685,7.312 v1(56.185,7.312)
NetLED8A_4: LED8A.4 U3A.12 | length 15.8
  Top Layer w0.254: LED8A.4 44.831,4.139 44.831,3.175 45.034,2.972 56.515,2.972 56.86,3.317 U3A.12
NetLED8B_2: LED8B.2 U3B.10 | length 9.3
  Top Layer w0.254: LED8B.2 47.927,36.043 53.444,36.043 54.663,34.823 55.393,34.823 55.542,34.972 55.542,36.032 U3B.10
NetLED8B_3: LED8B.3 U3B.11 | length 18.7
  Top Layer w0.254: v1(43.256,38.303) 43.256,37.569 43.405,37.42 LED8B.3 ; U3B.11 56.229,36.068 56.229,38.906 v1(56.261,38.938)
  Bottom Layer w0.254: v1(43.256,38.303) 43.404,38.303 43.646,38.545 52.917,38.545 53.14,38.322 55.165,38.322 55.676,38.834 56.157,38.834 v1(56.261,38.938)
NetLED8B_4: LED8B.4 U3B.12 | length 18.5
  Top Layer w0.254: v1(43.028,34.839) 43.028,35.839 43.208,36.02 LED8B.4 ; v1(56.791,34.839) 56.842,34.89 56.842,36.032 U3B.12
  Bottom Layer w0.254: v1(43.028,34.839) 43.755,35.566 56.064,35.566 v1(56.791,34.839)
NetR1A_2: R1A.2 U1A.15 | length 8.5
  Top Layer w0.254: U1A.15@58.81,25.976 58.81,24.782 59.437,24.155 61.468,24.155 64.017,26.705 R1A.2
NetR1B_2: R1B.2 U1B.15 | length 7.5
  Top Layer w0.254: U1B.15 58.825,56.143 58.825,55.269 59.113,54.98 60.646,54.98 60.659,54.993 62.791,54.993 63.83,56.032 64.687,56.032 R1B.2
NetR2A_2: R2A.2 U2A.15 | length 8.9
  Top Layer w0.254: U2A.15@58.81,15.932 58.829,15.914 58.829,15.123 58.928,15.024 58.928,14.428 59.437,13.919 61.207,13.919 64.084,16.796 64.687,16.796 R2A.2
NetR2B_2: R2B.2 U2B.15 | length 8
  Top Layer w0.254: U2B.15@58.81,46.063 58.829,46.045 58.829,45.058 59.437,44.45 62.179,44.45 64.052,46.323 R2B.2
NetR3A_2: R3A.2 U3A.15 | length 8.5
  Top Layer w0.254: U3A.15 58.829,5.87 58.829,4.774 59.437,4.166 61.138,4.166 64.008,7.036 64.735,7.036 R3A.2
NetR3B_2: R3B.2 U3B.15 | length 8.3
  Top Layer w0.254: U3B.15@58.81,36.02 58.829,36.001 58.829,34.87 59.38,34.318 61.649,34.318 63.844,36.514 R3B.2
NetR4_2: R4.2 U4.4 U4.5 | length 21.5
  Top Layer w0.254: R4.2 18.872,39.395 18.694,39.218 18.694,35.548 17.831,34.684 17.831,31.648 18.694,30.785 18.694,26.314 ; U4.5 18.923,23.114 18.694,23.343 18.694,26.314 ; U4.4 20.257,25.818 19.191,25.818 18.694,26.314
NetU1_49: U1.49 U4.20 | length 43.9
  Top Layer w0.254: U1.49 15.888,40.627 17.691,40.627 v1(17.704,40.615) ; U4.20 38.84,23.114 38.989,23.263 v1(38.989,40.589)
  Bottom Layer w0.254: v1(17.704,40.615) 17.716,40.602 38.976,40.602 v1(38.989,40.589)
NetU1_51: U1.51 U4.22 | length 33
  Top Layer w0.254: U1.51 15.9,38.125 17.678,38.125 v1(17.704,38.151) ; U4.22 37.215,28.194 37.363,28.343 v1(37.363,38.049)
  Bottom Layer w0.254: v1(17.704,38.151) 17.755,38.1 37.313,38.1 v1(37.363,38.049)
NetU1_53: U1.53 U4.21 | length 35
  Top Layer w0.254: U1.53 15.888,35.573 17.691,35.573 v1(17.704,35.585) ; U4.21 38.053,25.654 38.262,25.863 38.262,35.677 v1(38.227,35.712)
  Bottom Layer w0.254: v1(17.704,35.585) 17.767,35.649 38.163,35.649 v1(38.227,35.712)
NetU1A_14: U1A.14 U2A.2 | length 4.2
  Top Layer w0.254: U1A.14@58.16,25.976 58.16,24.669 58.826,24.003 58.826,22.049 U2A.2@58.81,22.032
NetU1B_14: U1B.14 U2B.2 | length 4.3
  Top Layer w0.254: U1B.14 58.179,56.139 58.179,55.295 58.321,55.153 58.321,54.963 58.81,54.474 U2B.2@58.81,52.163
NetU2A_14: U2A.14 U3A.2 | length 4.2
  Top Layer w0.254: U2A.14@58.16,15.932 58.179,15.914 58.179,15.06 58.424,14.815 58.424,14.195 58.826,13.792 58.826,12.005 U3A.2
NetU2B_14: U2B.14 U3B.2 | length 4.2
  Top Layer w0.254: U2B.14@58.16,46.063 58.16,44.982 58.81,44.332 U3B.2@58.81,42.119
NetU3A_14: U3A.14
SPI1_NSS: U1.32 U4.19 | length 69
  Top Layer w0.254: U4.19 37.872,20.574 38.43,20.015 v1(38.43,2.54) ; v1(72.72,2.438) 72.72,14.935 72.949,15.164 74.219,15.164 U1.32
  Bottom Layer w0.254: v1(38.43,2.54) 38.481,2.489 72.669,2.489 v1(72.72,2.438)
pads on no net: U1.0 U1.1 U1.2 U1.3 U1.4 U1.5 U1.7 U1.9 U1.10 U1.11 U1.12 U1.13 U1.14 U1.15 U1.17 U1.18 U1.21 U1.23 U1.24 U1.25 U1.26 U1.27 U1.28 U1.29 U1.30 U1.31 U1.33 U1.34 U1.35 U1.36 U1.37 U1.38 U1.39 U1.40 U1.41 U1.42 U1.43 U1.44 U1.45 U1.46 U1.48 U1.50 U1.52 U1.54 U1.55 U1.56 U1.57 U1.59 U1.61 U1.63 U1.65 U1.66 U1.67 U1.69 U1.71 U1.72 U1.73 U1.74 U1.75 U1.76 U4.3 U4.6 U4.7 U4.8 U4.9 U4.10 U4.11 U4.12 U4.14 U4.15 U4.16 U4.17 U4.18 U4.23 U4.24

## Polygon pours and split planes (outlines as drawn)
GND on Top Layer "GND_L01_P001" (solid, remove dead copper, pour order 1): -0.66,68.809 -0.483,68.631 -0.483,0.102 90.348,0.102 90.805,0.559 90.322,1.041 90.322,69.088
GND on Bottom Layer "GND_L02_P002" (solid, remove dead copper, pour order 2): -0.203,69.063 -0.508,68.758 -0.508,-0.051 90.5,-0.051 90.805,0.254 90.602,0.457 90.602,68.758

## Keep-outs
Keep-Out Layer:
  the board outline again, w2

## Other copper
Top Layer:
  text "Nyiri Levente" at 5.715,22.86 h1.52 r90
Bottom Layer:
  text "Nyiri Levente" at 4.445,22.86 h1.52 r270

## Silkscreen, mask and mechanical layers (free items; w line width, h text height)
Mechanical 1:
  the board outline again, w0.254

## Text inside footprints (layer, text, board x,y; h text height)
U1: Bottom Overlay "CN10" at 17.145,55.118 h1.52; Bottom Overlay "CN7" at 78.105,55.118 h1.52